# Altium PCB board.PcbDoc (part 2 of 2)
Units mm, origin at the board's own origin, x right, y up, seen from the top; angles counter-clockwise.
Board outline 37.92 x 150 mm, 2 copper layers (Top Layer, Bottom Layer), stack 1.66 mm thick; 126 components, 64 nets, 338 pads, 180 vias.
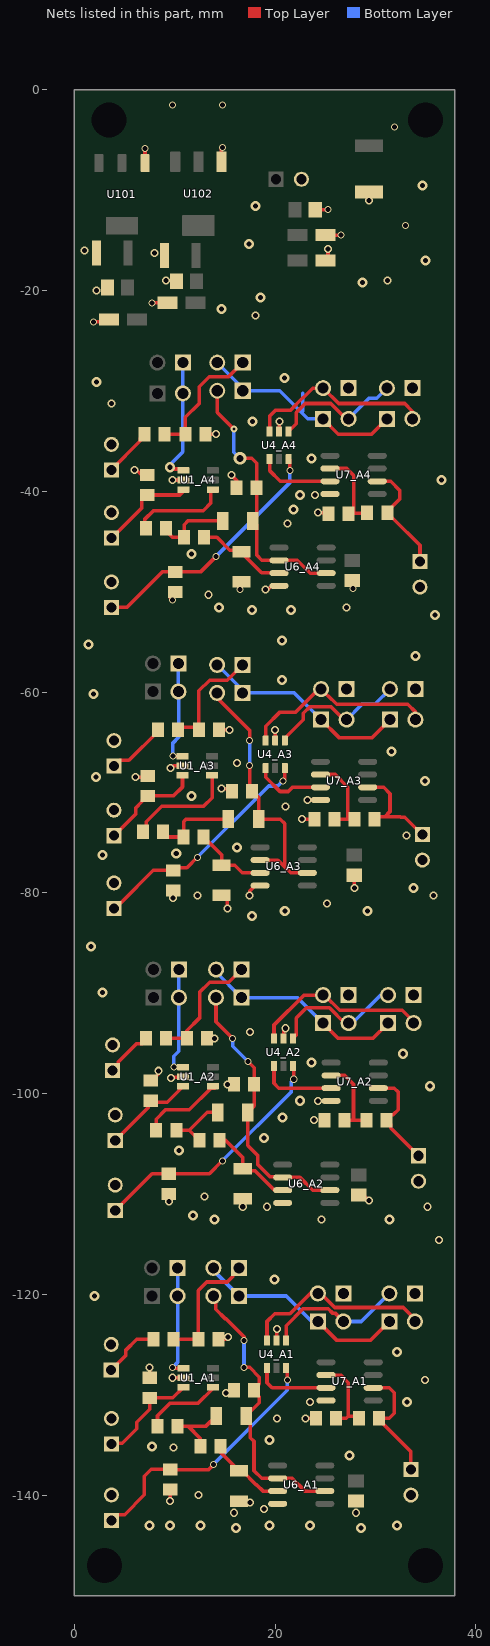
[diagram p2: the nets of this part, all layers, seen from the top]

## Via types
v1: diameter 0.8, hole 0.5, Top Layer to Bottom Layer, 69 vias
v2: diameter 1, hole 0.5, Top Layer to Bottom Layer, 63 vias
v3: diameter 0.7, hole 0.5, Top Layer to Bottom Layer, 30 vias
v4: diameter 1.27, hole 0.711, Top Layer to Bottom Layer, 17 vias
v5: diameter 0.7, hole 0.3, Top Layer to Bottom Layer, 1 vias

## Nets (pads, with @x,y where several pads share a name; then routed paths per layer and width w, separated by ;. In a path a pad name is that pad's centre, name@x,y a point inside that pad or via, vN(x,y) a via of type N, cw(c..) or ccw(c..) an arc to the next point about the centre after c; other vN are vias at no path point) (continued)
GND: C2_A1.1 C2_A2.1 C2_A3.1 C2_A4.1 C3_A1.1 C3_A2.1 C3_A3.1 C3_A4.1 C101.2 C102.2 C103.1 C104.2 C105.2 C106.1 C107.1 C108.1 C109.1 D1.1 J1_A1.1 J1_A2.1 J1_A3.1 J1_A4.1 J8_A1.1 J8_A2.1 J8_A3.1 J8_A4.1 J100.2 J_A1.2 J_A2.2 J_A3.2 J_A4.2 J_B1.2 J_B2.2 J_B3.2 J_B4.2 J_C1.2 J_C2.2 J_C3.2 J_C4.2 J_D1.2 J_D2.2 J_D3.2 J_D4.2 pad.0@3.448,-3 pad.0@35,-3 R1_A1.1 R1_A2.1 R1_A3.1 R1_A4.1 R2_A1.1 R2_A2.1 R2_A3.1 R2_A4.1 R5_A1.1 R5_A2.1 R5_A3.1 R5_A4.1 R8_A1.2 R8_A2.2 R8_A3.2 R8_A4.2 R9_A1.1 R9_A2.1 R9_A3.1 R9_A4.1 U1_A1.2 U1_A2.2 U1_A3.2 U1_A4.2 U4_A1.2 U4_A2.2 U4_A3.2 U4_A4.2 U6_A1.4 U6_A2.4 U6_A3.4 U6_A4.4 U7_A1.4 U7_A2.4 U7_A3.4 U7_A4.4 U101.1 U102.1 | length 47.4
  Top Layer w0.356: v3(1.905,-23.114) 3.194,-23.114 C104.2@3.448,-22.86 ; v1(5.988,-37.846) 6.176,-37.846 6.684,-38.354 R1_A4.1@7.258,-38.354 ; v1(6.115,-68.453) 7.192,-68.453 R1_A3.1@7.319,-68.326 ; U101.1@7.05,-7.289 v3(7.05,-5.842) ; R1_A1.1@7.512,-128.286 v1(7.512,-127.254) ; R1_A2.1@7.62,-98.695 7.745,-98.695 8.322,-98.118 8.322,-97.792 v1(8.407,-97.707) v1@8.492,-97.792 ; v3(7.747,-21.209) C105.2@9.271,-21.209 ; v1(9.544,-140.565) R8_A1.2@9.544,-139.43 ; R8_A4.2@9.544,-50.022 9.544,-50.546 v3(9.798,-50.8) ; v1(9.605,-67.564) 9.859,-67.31 U1_A3.2@10.783,-67.31 ; v1(9.652,-98.425) 9.715,-98.362 10.786,-98.362 U1_A2.2@10.849,-98.298 ; v1(9.798,-128.286) 10.863,-128.286 U1_A1.2@10.879,-128.27 ; v1(9.798,-38.862) U1_A4.2@11.063,-38.862 ; v1(9.859,-80.518) R8_A3.2@9.859,-79.74 ; R9_A4.1@13.068,-34.29 v1(14.116,-34.29) ; R9_A1.1@14.354,-124.46 15.043,-124.46 v1(15.297,-124.206) ; R9_A3.1@14.415,-63.754 v1(15.463,-63.754) ; U102.1@14.659,-7.16 14.659,-5.876 v3(14.772,-5.763) ; C2_A3.1@14.685,-80.24 14.862,-80.24 15.259,-80.637 v1(15.259,-81.534) ; v1(14.685,-69.596) 15.463,-69.596 R2_A3.1@15.717,-69.85 ; v1(15.259,-99.06) R2_A2.1@15.924,-99.06 ; v1(15.64,-38.354) 16.164,-38.878 R2_A4.1@16.164,-39.624 ; v3(16.513,-49.784) 16.513,-49.157 C2_A4.1@16.656,-49.014 ; v1(16.783,-111.252) C2_A2.1@16.783,-110.466 ; v1(17.463,-80.24) 17.463,-79.837 U6_A3.4@18.037,-79.263 ; v1(19.069,-49.784) 19.154,-49.699 19.39,-49.699 19.686,-49.403 U6_A4.4@19.927,-49.403 ; U4_A3.2@20.019,-64.814 v1(20.019,-63.754) ; U4_A1.2@20.151,-124.57 20.151,-123.505 v1(20.212,-123.444) ; U4_A4.2@20.405,-34.036 20.405,-33.081 v1(20.466,-33.02) ; U4_A2.2@20.847,-94.488 20.847,-93.66 v1(21.035,-93.472) ; v1(22.704,-72.644) R5_A3.1@23.909,-72.644 ; v1(23.05,-132.334) R5_A1.1@24.082,-132.334 ; v1(23.212,-70.739) U7_A3.4@24.527,-70.739 ; C103.1@24.006,-11.938 v3(25.292,-11.938) ; v1(24.26,-42.118) 25.208,-42.118 R5_A4.1@25.308,-42.218 ; C101.2@25.038,-14.478 v3(26.562,-14.478) ; C102.2@25.044,-17.018 25.275,-16.787 v1(25.275,-15.875) ; C3_A4.1@27.705,-48.879 27.705,-49.609 v3(27.769,-49.673) ; v1(27.893,-79.502) C3_A3.1@27.893,-78.232 ; C3_A2.1@28.34,-110.093 28.832,-110.093 v1(29.356,-110.617)
  Bottom Layer w0.356: v1(9.652,-98.425) v1@9.737,-98.34
  other v1: 15.91,-141.732 28.067,-141.732 18.923,-141.351 17.515,-140.716 12.354,-139.954 9.893,-135.255 20.212,-132.334 23.495,-130.683 15.132,-129.794 34.944,-128.524 36.325,-114.554 24.638,-112.522 19.201,-111.252 35.179,-111.252 9.417,-110.744 12.973,-110.236 23.876,-102.616 24.276,-100.711 13.989,-94.488 17.526,-93.853 25.165,-81.026 12.258,-80.264 35.767,-80.264 33.077,-74.272 21.035,-71.374 16.209,-67.056 27.131,-51.554 13.354,-50.292 21.228,-43.18 24,-40.354 3.702,-31.242 18.034,-22.479 2.234,-20 9.147,-19 31.182,-19 8,-16.256 1,-16 29.356,-11
  other v2: 16.129,-143.256 28.575,-143.256 7.512,-143.002 9.544,-143.002 12.559,-143.002 19.431,-143.002 23.495,-143.002 32.131,-143.002 27.432,-136.017 7.75,-135.128 19.431,-134.493 33.147,-130.683 32.131,-125.73 2.032,-120.142 19.939,-118.491 13.989,-112.522 31.388,-112.522 11.811,-112.141 10.417,-105.664 18.923,-104.394 20.764,-102.362 22.479,-100.695 35.433,-99.248 23.622,-96.901 32.766,-96.012 2.794,-89.916 1.651,-85.344 17.717,-82.296 20.969,-81.788 29.227,-81.788 33.801,-79.502 2.794,-76.232 10.16,-76.073 16.209,-75.453 11.684,-70.358 34.925,-68.834 2.159,-68.453 31.623,-65.913 1.905,-60.198 20.701,-58.801 33.989,-56.388 1.397,-55.245 20.701,-54.864 35.941,-52.324 17.717,-51.816 21.59,-51.816 14.415,-51.554 11.684,-46.228 21.844,-41.783 22.479,-40.354 36.576,-38.862 23.622,-36.703 17.769,-33.02 2.234,-29.083 20.955,-28.702 14.659,-21.844 18.542,-20.701 28.702,-19.177 35,-17.018 17.399,-15.367 18.034,-11.557 34.671,-9.525
  other v3: 33,-13.51 31.896,-3.683 9.779,-1.524 14.772,-1.524
NetC1_A1_1: C1_A1.1 R3_A1.1 R4_A1.2 | length 6.8
  Top Layer w0.356: R3_A1.1@10.29,-133.096 11.322,-133.096 ; R4_A1.2@12.559,-135.128 12.559,-134.333 11.322,-133.096 ; C1_A1.1@14.14,-132.08 13.124,-133.096 11.322,-133.096
NetC1_A1_2: C1_A1.2 J4_A1.2 R2_A1.2 U6_A1.2 U6_A1.6 | length 28.9
  Top Layer w0.356: J4_A1.2@13.862,-120.142 14.1,-120.38 14.1,-121.461 15.067,-122.428 15.132,-122.428 16.91,-124.206 v3(16.91,-124.57) ; v3(16.91,-127.254) 17.468,-127.254 18.434,-128.22 18.434,-128.903 17.797,-129.54 18.434,-130.177 18.434,-130.786 C1_A1.2@17.14,-132.08 17.537,-132.477 17.537,-134.25 17.907,-134.62 17.907,-137.541 18.669,-138.303 U6_A1.2@20.256,-138.303 21.717,-138.303 22.987,-139.573 U6_A1.6@24.956,-139.573
  Bottom Layer w0.356: v3(16.91,-127.254) v3(16.91,-124.57)
NetC1_A2_1: C1_A2.1 R3_A2.1 R4_A2.2 | length 6.3
  Top Layer w0.356: R3_A2.1@10.163,-103.632 11.465,-103.632 ; R4_A2.2@12.481,-104.648 11.465,-103.632 ; C1_A2.1@14.283,-101.854 13.243,-101.854 11.465,-103.632
NetC1_A2_2: C1_A2.2 J4_A2.2 R2_A2.2 U6_A2.2 U6_A2.6 | length 27.1
  Top Layer w0.356: J4_A2.2@14.132,-90.44 J4_A2.2@14.116,-90.424 14.116,-92.821 v3(15.783,-94.488) ; v3(17.291,-96.774) 17.924,-97.407 R2_A2.2@17.924,-99.06 17.924,-101.213 C1_A2.2@17.283,-101.854 17.283,-105.148 18.298,-106.162 18.298,-107.062 19.519,-108.284 20.717,-108.284 U6_A2.2@20.764,-108.331 22.479,-108.331 23.749,-109.601 U6_A2.6@25.464,-109.601
  Bottom Layer w0.356: v3(15.783,-94.488) 15.783,-95.266 v3(17.291,-96.774)
NetC1_A3_1: C1_A3.1 R3_A3.1 R4_A3.2 | length 8.4
  Top Layer w0.356: R3_A3.1@8.827,-73.914 9.335,-74.422 R4_A3.2@10.891,-74.422 10.891,-72.882 11.129,-72.644 C1_A3.1@15.358,-72.644
NetC1_A3_2: C1_A3.2 J4_A3.2 R2_A3.2 U6_A3.2 U6_A3.6 | length 26.6
  Top Layer w0.356: J4_A3.2@14.238,-60.071 14.476,-60.309 14.476,-60.812 17.479,-63.815 v3(17.479,-64.814) ; v3(17.479,-67.31) 17.479,-69.612 R2_A3.2@17.717,-69.85 18.358,-70.491 C1_A3.2@18.358,-72.644 20.527,-72.644 20.969,-73.086 20.969,-77.404 ; U6_A3.2@18.512,-76.723 20.288,-76.723 20.969,-77.404 ; U6_A3.6@23.212,-77.993 21.558,-77.993 20.969,-77.404
  Bottom Layer w0.356: v3(17.479,-67.31) v3(17.479,-64.814)
NetC1_A4_1: C1_A4.1 R3_A4.1 R4_A4.2 | length 7.5
  Top Layer w0.356: R3_A4.1@9.115,-43.91 9.782,-44.577 R4_A4.2@10.941,-44.577 10.941,-43.307 11.322,-42.926 C1_A4.1@14.869,-42.926
NetC1_A4_2: C1_A4.2 J4_A4.2 R2_A4.2 U6_A4.2 U6_A4.6 | length 26.7
  Top Layer w0.356: J4_A4.2@14.243,-29.972 14.243,-32.131 v5(15.894,-33.782) ; v4(16.513,-36.703) 17.686,-36.703 18.164,-37.181 R2_A4.2@18.164,-39.624 18.164,-42.531 C1_A4.2@17.769,-42.926 18.164,-43.321 18.164,-46.339 18.688,-46.863 U6_A4.2@20.402,-46.863 22.228,-46.863 23.498,-48.133 U6_A4.6@25.102,-48.133
  Bottom Layer w0.356: v5(15.894,-33.782) 15.894,-36.084 v4(16.513,-36.703)
NetC2_A1_2: C2_A1.2 R4_A1.1 U6_A1.3 | length 7.9
  Top Layer w0.356: R4_A1.1@14.559,-135.128 14.559,-135.722 C2_A1.2@16.402,-137.565 16.727,-137.565 18.1,-138.938 18.161,-138.938 18.796,-139.573 U6_A1.3@20.256,-139.573
NetC2_A2_2: C2_A2.2 R4_A2.1 U6_A2.3 | length 9
  Top Layer w0.356: R4_A2.1@14.481,-104.648 15.082,-104.648 16.783,-106.349 C2_A2.2@16.783,-107.466 16.987,-107.67 18.008,-107.67 19.892,-109.554 20.717,-109.554 U6_A2.3@20.764,-109.601
NetC2_A3_2: C2_A3.2 R4_A3.1 U6_A3.3 | length 7.2
  Top Layer w0.356: R4_A3.1@12.891,-74.422 14.685,-76.216 C2_A3.2@14.685,-77.24 15.979,-77.24 16.732,-77.993 U6_A3.3@18.037,-77.993
NetC2_A4_2: C2_A4.2 R4_A4.1 U6_A4.3 | length 9.7
  Top Layer w0.356: R4_A4.1@12.941,-44.577 14.211,-44.577 15.497,-45.863 16.656,-45.863 C2_A4.2@17.291,-46.498 ; C2_A4.2@16.656,-46.114 18.659,-48.117 U6_A4.3@20.402,-48.117
NetJ1_A1_2: J1_A1.2 J7_A1.2 U4_A1.3 | length 19.1
  Top Layer w0.356: U4_A1.3@19.201,-124.57 19.201,-122.682 19.963,-121.92 21.482,-121.92 23.514,-119.888 24.558,-119.888 25.955,-121.285 32.785,-121.285 33.928,-122.428 J7_A1.2@33.928,-122.682
NetJ1_A2_2: J1_A2.2 J7_A2.2 U4_A2.3 | length 17.7
  Top Layer w0.356: U4_A2.3@19.897,-94.488 19.897,-93.152 22.879,-90.17 J1_A2.2@24.784,-90.17 24.911,-90.17 25.622,-90.881 25.65,-90.881 26.449,-91.68 32.672,-91.68 33.801,-92.809 J7_A2.2@33.801,-92.964
NetJ1_A3_2: J1_A3.2 J7_A3.2 U4_A3.3 | length 19.6
  Top Layer w0.356: U4_A3.3@19.069,-64.814 19.069,-63.403 20.496,-61.976 22.051,-61.976 24.337,-59.69 J1_A3.2@24.591,-59.69 25.302,-60.401 25.33,-60.401 26.143,-61.214 33.227,-61.214 33.989,-61.976 J7_A3.2@33.989,-62.738
NetJ1_A4_2: J1_A4.2 J7_A4.2 U4_A4.3 | length 18.6
  Top Layer w0.356: U4_A4.3@19.455,-34.036 19.455,-32.507 20.047,-31.915 21.543,-31.915 22.775,-30.683 22.798,-30.683 23.763,-29.718 J1_A4.2@24.784,-29.718 24.812,-29.718 26.336,-31.242 32.912,-31.242 33.674,-32.004 J7_A4.2@33.674,-32.766
NetJ2_A1_1: J2_A1.1 J4_A1.1 J6_A1.2 J7_A1.1 | length 21.4
  Top Layer w0.356: J2_A1.1@24.276,-122.682 26.164,-124.57 29.5,-124.57 J7_A1.1@31.388,-122.682
  Bottom Layer w0.356: J6_A1.2@13.862,-117.348 13.862,-117.602 J4_A1.1@16.402,-120.142 21.116,-120.142 23.656,-122.682 J2_A1.1@24.276,-122.682
NetJ2_A1_2: J2_A1.2 J8_A1.2 U4_A1.1 | length 14.1
  Top Layer w0.356: U4_A1.1@21.101,-124.57 21.101,-123.091 22.78,-121.412 25.292,-121.412 25.724,-121.844 25.978,-121.844 J2_A1.2@26.816,-122.682
  Bottom Layer w0.356: J2_A1.2@26.816,-122.682 28.594,-122.682 J8_A1.2@31.388,-119.888
NetJ2_A2_1: J2_A2.1 J4_A2.1 J6_A2.2 J7_A2.1 | length 20.8
  Top Layer w0.356: J2_A2.1@24.784,-92.964 26.308,-94.488 29.737,-94.488 J7_A2.1@31.261,-92.964
  Bottom Layer w0.356: J6_A2.2@14.132,-87.63 14.132,-87.9 J4_A2.1@16.656,-90.424 22.244,-90.424 J2_A2.1@24.784,-92.964
NetJ2_A2_2: J2_A2.2 J8_A2.2 U4_A2.1 | length 13.5
  Top Layer w0.356: U4_A2.1@21.797,-94.488 22.117,-94.168 22.117,-92.456 23.133,-91.44 25.419,-91.44 26.943,-92.964 J2_A2.2@27.324,-92.964
  Bottom Layer w0.356: J2_A2.2@27.324,-92.964 27.705,-92.964 30.499,-90.17 J8_A2.2@31.261,-90.17
NetJ2_A3_1: J2_A3.1 J4_A3.1 J6_A3.2 J7_A3.1 | length 21.1
  Top Layer w0.356: J2_A3.1@24.591,-62.738 26.369,-64.516 29.671,-64.516 J7_A3.1@31.449,-62.738
  Bottom Layer w0.356: J6_A3.2@14.238,-57.277 16.778,-59.817 J4_A3.1@16.778,-60.071 21.924,-60.071 J2_A3.1@24.591,-62.738
NetJ2_A3_2: J2_A3.2 J8_A3.2 U4_A3.1 | length 14.2
  Top Layer w0.356: U4_A3.1@20.969,-64.814 20.969,-64.582 22.813,-62.738 22.813,-62.103 23.448,-61.468 25.607,-61.468 26.877,-62.738 J2_A3.2@27.131,-62.738
  Bottom Layer w0.356: J2_A3.2@27.131,-62.738 28.655,-61.214 29.925,-61.214 J8_A3.2@31.449,-59.69
NetJ2_A4_1: J2_A4.1 J4_A4.1 J6_A4.2 J7_A4.1 | length 22.4
  Top Layer w0.356: J2_A4.1@24.784,-32.766 26.308,-34.29 29.61,-34.29 J7_A4.1@31.134,-32.766
  Bottom Layer w0.356: J6_A4.2@14.243,-27.178 16.783,-29.718 J4_A4.1@16.783,-29.972 20.466,-29.972 23.26,-32.766 J2_A4.1@24.784,-32.766 ; 22.752,-32.004 22.752,-30.226
NetJ2_A4_2: J2_A4.2 J8_A4.2 U4_A4.1 | length 13.5
  Top Layer w0.356: U4_A4.1@21.355,-34.036 21.355,-34.021 22.102,-33.274 22.102,-32.146 23.006,-31.242 25.546,-31.242 27.07,-32.766 J2_A4.2@27.324,-32.766
  Bottom Layer w0.356: J2_A4.2@27.324,-32.766 29.356,-30.734 30.118,-30.734 J8_A4.2@31.134,-29.718
NetJ3_A1_2: J3_A1.2 J5_A1.1 U1_A1.1 | length 11.2
  Top Layer w0.356: v3(9.798,-127.254) 9.864,-127.32 U1_A1.1@10.879,-127.32
  Bottom Layer w0.356: v3(9.798,-127.254) 10.29,-126.762 J3_A1.2@10.29,-120.142 J5_A1.1@10.29,-117.348
NetJ3_A2_2: J3_A2.2 J5_A2.1 U1_A2.1 | length 10.8
  Top Layer w0.356: v3(9.925,-97.348) U1_A2.1@10.849,-97.348
  Bottom Layer w0.356: v3(9.925,-97.348) 9.925,-96.266 10.417,-95.774 J3_A2.2@10.417,-90.424 J5_A2.1@10.417,-87.63
NetJ3_A3_2: J3_A3.2 J5_A3.1 U1_A3.1 | length 10.4
  Top Layer w0.356: v3(9.831,-66.36) U1_A3.1@10.783,-66.36
  Bottom Layer w0.356: v3(9.831,-66.36) 9.831,-65.052 10.418,-64.465 10.418,-59.995 J3_A3.2@10.367,-59.944 J5_A3.1@10.367,-57.15
NetJ3_A4_2: J3_A4.2 J5_A4.1 U1_A4.1 | length 12.1
  Top Layer w0.356: v2(9.544,-37.592) 9.718,-37.592 9.891,-37.765 10.716,-37.765 U1_A4.1@10.863,-37.912
  Bottom Layer w0.356: v2@9.544,-37.338 10.814,-36.068 J3_A4.2@10.814,-30.226 J5_A4.1@10.814,-27.178
NetJ6_A1_1: J6_A1.1 R7_A1.1 R9_A1.2 | length 12.4
  Top Layer w0.356: R7_A1.1@9.893,-124.46 R9_A1.2@12.354,-124.46 12.354,-119.599 13.208,-118.745 15.24,-118.745 15.78,-118.205 15.78,-117.97 J6_A1.1@16.402,-117.348
NetJ6_A2_1: J6_A2.1 R7_A2.1 R9_A2.2 | length 12.3
  Top Layer w0.356: R7_A2.1@9.147,-94.488 R9_A2.2@11.211,-94.488 11.211,-93.726 12.481,-92.456 12.481,-89.9 13.481,-88.9 15.402,-88.9 J6_A2.1@16.672,-87.63
NetJ6_A3_1: J6_A3.1 R7_A3.1 R9_A3.2 | length 11.4
  Top Layer w0.356: R7_A3.1@10.351,-63.5 R9_A3.2@12.415,-63.5 ; R9_A3.2@12.415,-63.754 R9_A3.2@12.415,-63.5 ; J6_A3.1@16.778,-57.277 15.254,-58.801 13.481,-58.801 12.415,-59.867 R9_A3.2@12.415,-63.5
NetJ6_A4_1: J6_A4.1 R7_A4.1 R9_A4.2 | length 12.7
  Top Layer w0.356: R7_A4.1@9.004,-34.29 R9_A4.2@11.068,-34.29 11.068,-32.625 12.451,-31.242 12.451,-29.573 13.434,-28.59 15.371,-28.59 J6_A4.1@16.783,-27.178
NetJ_A1_1: J_A1.1 R1_A4.2 U1_A4.3 | length 10
  Top Layer w0.356: J_A1.1@3.702,-44.658 6.711,-41.649 6.711,-40.647 7.004,-40.354 R1_A4.2@7.258,-40.354 10.521,-40.354 U1_A4.3@11.063,-39.812
NetJ_A2_1: J_A2.1 R1_A3.2 U1_A3.3 | length 10.4
  Top Layer w0.356: J_A2.1@3.956,-74.295 6.115,-72.136 6.115,-71.53 6.772,-70.873 6.772,-70.748 7.194,-70.326 R1_A3.2@7.319,-70.326 9.891,-70.326 10.783,-69.434 U1_A3.3@10.783,-68.26
NetJ_A3_1: J_A3.1 R1_A2.2 U1_A2.3 | length 9.4
  Top Layer w0.356: J_A3.1@4.083,-104.648 7.346,-101.385 7.346,-100.99 R1_A2.2@7.631,-100.706 ; R1_A2.2@7.62,-100.695 7.763,-100.838 9.259,-100.838 U1_A2.3@10.849,-99.248
NetJ_A4_1: J_A4.1 R1_A1.2 U1_A1.3 | length 10.6
  Top Layer w0.356: J_A4.1@3.702,-134.874 3.78,-134.796 4.777,-134.796 6.223,-133.35 6.223,-132.708 7.512,-131.419 R1_A1.2@7.512,-130.286 9.813,-130.286 U1_A1.3@10.879,-129.22
NetJ_B1_1: J_B1.1 R6_A4.2 U7_A4.6 | length 11.6
  Top Layer w0.356: U7_A4.6@30.182,-38.989 31.515,-38.989 32.404,-39.878 32.404,-40.771 31.182,-41.993 31.182,-42.243 31.604,-42.665 31.729,-42.665 34.436,-45.372 J_B1.1@34.436,-46.99
NetJ_B2_1: J_B2.1 R6_A3.2 U7_A3.6 | length 10.6
  Top Layer w0.356: U7_A3.6@29.227,-69.469 30.814,-69.469 31.449,-70.104 31.449,-71.882 30.941,-72.39 ; R6_A3.2@29.909,-72.644 30.163,-72.39 30.941,-72.39 ; J_B2.1@34.67,-74.183 32.928,-72.441 32.531,-72.441 32.48,-72.39 30.941,-72.39
NetJ_B3_1: J_B3.1 R6_A2.2 U7_A2.6 | length 10.4
  Top Layer w0.356: U7_A2.6@30.29,-99.441 31.877,-99.441 32.258,-99.822 32.258,-101.6 31.789,-102.069 31.521,-102.069 31.099,-102.491 R6_A2.2@31.099,-102.616 31.521,-103.038 31.521,-103.403 J_B3.1@34.29,-106.172
NetJ_B4_1: J_B4.1 R6_A1.2 U7_A1.6 | length 12.5
  Top Layer w0.356: U7_A1.6@29.782,-129.286 31.369,-129.286 31.877,-129.794 31.877,-131.826 31.369,-132.334 R6_A1.2@30.356,-132.334 30.356,-132.459 33.528,-135.631 J_B4.1@33.528,-137.43
NetJ_C1_1: J_C1.1 R8_A4.1 U4_A4.6 | length 25.3
  Top Layer w0.356: J_C1.1@3.702,-51.554 5.234,-51.554 8.766,-48.022 R8_A4.1@10.052,-48.022 12.576,-48.022 v3(14.116,-46.482) ; U4_A4.6@21.355,-36.786 21.482,-36.913 v3(21.482,-37.912)
  Bottom Layer w0.356: v3(14.116,-46.482) 21.482,-39.116 v3(21.482,-37.912)
NetJ_C2_1: J_C2.1 R8_A3.1 U4_A3.6 | length 23.3
  Top Layer w0.356: J_C2.1@3.956,-81.534 4.528,-80.962 4.655,-80.962 7.877,-77.74 R8_A3.1@9.859,-77.74 ; R8_A3.1@9.859,-77.486 11.226,-77.486 v3(12.258,-76.454) ; v3(20.781,-68.834) 20.969,-68.646 U4_A3.6@20.969,-67.564
  Bottom Layer w0.356: v3(12.258,-76.454) 19.37,-69.342 20.273,-69.342 v3(20.781,-68.834)
NetJ_C3_1: J_C3.1 R8_A2.1 U4_A2.6 | length 25.1
  Top Layer w0.356: J_C3.1@4.083,-111.633 7.75,-107.966 R8_A2.1@9.417,-107.966 13.465,-107.966 v3(14.751,-106.68) ; U4_A2.6@21.797,-97.238 21.863,-97.304 v3(21.863,-98.552)
  Bottom Layer w0.356: v3(14.751,-106.68) 21.609,-99.822 21.609,-98.806 v3(21.863,-98.552)
NetJ_C4_1: J_C4.1 R8_A1.1 U4_A1.6 | length 26.3
  Top Layer w0.356: J_C4.1@3.702,-142.494 4.274,-141.922 5.017,-141.922 6.985,-139.954 6.985,-138.092 7.663,-137.414 9.528,-137.414 R8_A1.1@9.544,-137.43 13.402,-137.43 13.862,-136.97 v3(13.862,-136.906) ; U4_A1.6@21.101,-127.32 21.228,-127.447 v3(21.228,-128.524)
  Bottom Layer w0.356: v3(13.862,-136.906) 21.228,-129.54 v3(21.228,-128.524)
NetJ_D1_1: J_D1.1 R7_A4.2 | length 4.9
  Top Layer w0.356: J_D1.1@3.702,-37.846 6.582,-34.966 6.582,-34.712 R7_A4.2@7.004,-34.29
NetJ_D2_1: J_D2.1 R7_A3.2 | length 6
  Top Layer w0.356: J_D2.1@3.956,-67.354 4.528,-66.782 5.448,-66.782 8.351,-63.879 R7_A3.2@8.351,-63.754
NetJ_D3_1: J_D3.1 R7_A2.2 | length 4.9
  Top Layer w0.356: J_D3.1@3.829,-97.663 4.401,-97.091 4.401,-96.818 6.184,-95.035 6.725,-95.035 7.147,-94.613 R7_A2.2@7.147,-94.488
NetJ_D4_1: J_D4.1 R7_A1.2 | length 5.8
  Top Layer w0.356: J_D4.1@3.683,-127.508 5.112,-126.079 5.112,-125.571 6.223,-124.46 R7_A1.2@7.893,-124.46
NetR3_A1_2: R3_A1.2 U1_A1.4 | length 7.8
  Top Layer w0.356: R3_A1.2@8.29,-133.096 8.29,-132.064 9.509,-130.845 12.303,-130.845 13.829,-129.319 U1_A1.4@13.829,-129.22
NetR3_A2_2: R3_A2.2 U1_A2.4 | length 8.5
  Top Layer w0.356: R3_A2.2@8.163,-103.632 8.163,-102.523 9.086,-101.6 11.465,-101.6 13.627,-99.438 13.989,-99.438 U1_A2.4@13.799,-99.248
NetR3_A3_2: R3_A3.2 U1_A3.4 | length 11
  Top Layer w0.356: R3_A3.2@6.827,-73.914 7.18,-73.561 7.18,-72.899 8.705,-71.374 12.875,-71.374 13.733,-70.516 U1_A3.4@13.733,-68.26
NetR3_A4_2: R3_A4.2 U1_A4.4 | length 9.7
  Top Layer w0.356: R3_A4.2@7.004,-43.688 7.004,-42.799 7.893,-41.91 12.846,-41.91 13.613,-41.143 13.613,-39.812 U1_A4.4@13.796,-39.812
NetR5_A1_2: R5_A1.2 R6_A1.1 U7_A1.2 | length 8.3
  Top Layer w0.356: U7_A1.2@25.082,-128.016 26.543,-128.016 27.305,-128.778 27.305,-132.126 ; R5_A1.2@26.082,-132.334 27.097,-132.334 27.305,-132.126 ; R6_A1.1@28.356,-132.334 28.148,-132.126 27.305,-132.126
NetR5_A2_2: R5_A2.2 R6_A2.1 U7_A2.2 | length 8.4
  Top Layer w0.356: U7_A2.2@25.59,-98.171 26.943,-98.171 27.813,-99.041 27.813,-102.536 27.733,-102.616 ; R5_A2.2@26.908,-102.616 27.733,-102.616 ; R6_A2.1@29.099,-102.616 27.733,-102.616
NetR5_A3_2: R5_A3.2 R6_A3.1 U7_A3.2 | length 8.9
  Top Layer w0.356: U7_A3.2@24.527,-68.199 25.988,-68.199 27.258,-69.469 27.258,-72.39 27.655,-72.39 R6_A3.1@27.909,-72.644 R5_A3.2@25.909,-72.644
NetR5_A4_2: R5_A4.2 R6_A4.1 U7_A4.2 | length 8.5
  Top Layer w0.356: U7_A4.2@25.482,-37.719 27.131,-37.719 27.832,-38.42 R5_A4.2@27.832,-42.164 ; R5_A4.2@27.308,-42.218 27.362,-42.164 R5_A4.2@27.832,-42.164 ; R6_A4.1@29.372,-42.164 R5_A4.2@27.832,-42.164
NetU4_A1_4: U4_A1.4 U7_A1.3 | length 7.6
  Top Layer w0.356: U4_A1.4@19.201,-127.32 19.201,-128.783 19.704,-129.286 U7_A1.3@25.082,-129.286
NetU4_A2_4: U4_A2.4 U7_A2.3 | length 7.6
  Top Layer w0.356: U4_A2.4@19.897,-97.238 19.897,-98.955 20.383,-99.441 U7_A2.3@25.59,-99.441
NetU4_A3_4: U4_A3.4 U7_A3.3 | length 7.5
  Top Layer w0.356: U4_A3.4@19.069,-67.564 19.069,-68.456 20.502,-69.889 21.311,-69.889 21.731,-69.469 U7_A3.3@24.908,-69.469
NetU4_A4_4: U4_A4.4 U7_A4.3 | length 7.6
  Top Layer w0.356: U4_A4.4@19.455,-36.786 19.455,-37.912 20.532,-38.989 U7_A4.3@25.482,-38.989
pads on no net: U6_A1.1 U6_A1.5 U6_A1.8 U6_A2.1 U6_A2.5 U6_A2.8 U6_A3.1 U6_A3.5 U6_A3.8 U6_A4.1 U6_A4.5 U6_A4.8 U7_A1.1 U7_A1.5 U7_A1.8 U7_A2.1 U7_A2.5 U7_A2.8 U7_A3.1 U7_A3.5 U7_A3.8 U7_A4.1 U7_A4.5 U7_A4.8

## Polygon pours and split planes (outlines as drawn)
GND on Bottom Layer "bot" (solid, remove dead copper, pour order 2): 0,-150 0,0 37.924,0 37.924,-150
GND on Top Layer "top" (solid, remove dead copper, pour order 3): 0,-150 0,0 37.924,0 37.924,-150

## Silkscreen, mask and mechanical layers (free items; w line width, h text height)
Top Overlay:
  lines w0.2: 3.194,-115.57 35.452,-115.57 ; 3.509,-55.626 35.767,-55.626 ; 3.575,-85.852 35.833,-85.852 ; 3.702,-25.654 35.96,-25.654 ; 28.611,-124.46 28.611,-115.57 ; 28.926,-64.516 28.926,-55.626 ; 28.992,-94.742 28.992,-85.852 ; 29.119,-34.544 29.119,-25.654
  lines w0.5: 0.508,-61.976 22.576,-61.976 ; 0.635,-121.92 22.261,-121.92 ; 0.908,-92.202 22.642,-92.202 ; 0.908,-32.004 22.769,-32.004 ; 12.101,-121.92 12.101,-114.046 ; 12.416,-61.976 12.416,-54.102 ; 12.482,-92.202 12.482,-84.328 ; 12.609,-32.004 12.609,-24.13 ; 22.481,-124.46 22.481,-114.046 ; 22.498,-124.443 36.993,-124.443 ; 22.796,-54.102 23.006,-54.312 23.006,-64.499 37.308,-64.499 ; 22.862,-94.742 22.862,-84.328 ; 22.879,-94.725 37.374,-94.725 ; 22.989,-34.544 22.989,-24.13 ; 23.006,-34.527 37.501,-34.527 ; 0.508,-144.399 36.993,-144.399 36.993,-117.111 33.928,-114.046 4.591,-114.046 0.508,-118.129 0.508,-144.399 ; 0.508,-113.411 0.508,-88.792 4.972,-84.328 34.309,-84.328 37.374,-87.393 37.374,-113.411 0.508,-113.411 ; 0.508,-83.439 37.308,-83.439 37.308,-57.167 34.243,-54.102 4.906,-54.102 0.508,-58.5 0.508,-83.439 ; 0.508,-53.34 0.508,-28.721 5.099,-24.13 34.436,-24.13 37.501,-27.195 37.501,-53.34 0.508,-53.34
  text "Power IN" at 25.038,-1.524 h0.8
  text "+" at 16,-3 h3
  text "12V" at 25.044,-3 h0.8
  text "min 7V" at 24.933,-4.218 h0.8
  text "PWM input" at 5.226,-25.4 h0.8
  text "IN ?" at 16.005,-25.4 h0.8
  text "enable Signal?" at 23.768,-25.4 h0.8
  text "high" at 23.768,-26.924 h0.8
  text "low" at 30.88,-26.924 h0.8
  text "analog" at 18.307,-27.432 h0.8
  text "3.3V" at 3.448,-28.194 h0.8
  text "active" at 23.768,-28.194 h0.8
  text "active" at 30.88,-28.194 h0.8
  text "PWM" at 18.688,-30.226 h0.8
  text "5V" at 4.21,-30.48 h0.8
  text "analog in" at 1.127,-33.423 h0.8
  text "PWM in" at 1.416,-40.386 h0.8
  text "out" at 34.944,-44.958 h0.8
  text "enable in" at 1.416,-47.244 h0.8
  text "PWM input" at 5.033,-55.372 h0.8
  text "IN ?" at 15.812,-55.372 h0.8
  text "enable Signal?" at 23.575,-55.372 h0.8
  text "high" at 23.575,-56.896 h0.8
  text "low" at 30.687,-56.896 h0.8
  text "analog" at 18.164,-57.658 h0.8
  text "3.3V" at 2.747,-58.166 h0.8
  text "active" at 23.575,-58.166 h0.8
  text "active" at 30.687,-58.166 h0.8
  text "5V" at 3.509,-60.452 h0.8
  text "PWM" at 19.988,-60.452 h0.8
  text "analog in" at 1.289,-63.119 h0.8
  text "PWM in" at 1.543,-70.104 h0.8
  text "out" at 35.005,-72.39 h0.8
  text "enable in" at 1.416,-77.216 h0.8
  text "PWM input" at 5.099,-85.598 h0.8
  text "IN ?" at 15.878,-85.598 h0.8
  text "enable Signal?" at 23.641,-85.598 h0.8
  text "high" at 23.641,-87.122 h0.8
  text "low" at 30.753,-87.122 h0.8
  text "analog" at 18.074,-87.719 h0.8
  text "3.3V" at 3.321,-88.392 h0.8
  text "active" at 23.641,-88.392 h0.8
  text "active" at 30.753,-88.392 h0.8
  text "5V" at 4.083,-90.678 h0.8
  text "PWM" at 19.196,-90.678 h0.8
  text "analog in" at 0.889,-93.345 h0.8
  text "PWM in" at 1.143,-100.33 h0.8
  text "out" at 34.544,-104.267 h0.8
  text "enable in" at 1.016,-107.315 h0.8
  text "PWM input" at 4.718,-115.316 h0.8
  text "IN ?" at 15.497,-115.316 h0.8
  text "enable Signal?" at 23.26,-115.316 h0.8
  text "high" at 23.26,-116.84 h0.8
  text "low" at 30.372,-116.84 h0.8
  text "analog" at 17.769,-117.6 h0.8
  text "3.3V" at 2.94,-118.11 h0.8
  text "active" at 23.26,-118.11 h0.8
  text "active" at 30.372,-118.11 h0.8
  text "5V" at 3.702,-120.396 h0.8
  text "PWM" at 18.923,-120.904 h0.8
  text "analog in" at 0.762,-123.19 h0.8
  text "PWM in" at 1.143,-130.683 h0.8
  text "out" at 34.036,-135.509 h0.8
  text "enable in" at 1.016,-138.049 h0.8
  text "AOTF board V2" at 18.669,-146.177 h0.8
  text "ew / ck / 2022_10" at 18.822,-147.58 h0.8
  text "Ries group" at 18.767,-148.965 h0.8
M1_BoardOutline:
  the board outline again, w0.254
M12_titleBlock:
  lines w0.127: -67.95,-186.677 -67.95,6.363 ; -67.95,-138.417 -62.87,-138.417 ; -67.95,-90.157 -62.87,-90.157 ; -67.95,-41.897 -62.87,-41.897 ; -62.87,-181.597 -62.87,1.283 ; 78.1,-186.677 78.1,-181.597 ; 104.77,-181.597 69.21,-181.597 69.21,-151.117 104.77,-151.117 ; 105.507,-173.977 219.07,-173.977 ; 105.507,-166.357 219.07,-166.357 ; 105.507,-158.737 142.87,-158.737 ; 142.87,-181.597 142.87,-166.357 142.87,-151.117 ; 151.125,-186.677 151.125,-181.597 ; 151.125,1.283 151.125,6.363 ; 196.21,-181.597 196.21,-166.357 ; 219.07,-138.417 224.15,-138.417 ; 219.07,-90.157 224.15,-90.157 ; 219.07,-41.897 224.15,-41.897 ; 219.07,1.283 219.07,-181.597 ; 224.15,-186.677 224.15,6.363 ; 142.87,-151.117 219.07,-151.117 219.07,-181.597 ; 142.87,-151.117 105.507,-151.117 105.507,-181.597 219.07,-181.597
  lines w0.254: 171.864,-150.495 171.864,-0.635 ; 171.864,-60.273 217.584,-60.273 217.584,-57.733 217.584,-38.735 ; 171.864,-38.735 217.584,-38.735 ; 171.864,-33.655 217.584,-33.655 217.584,-38.735
  text "1" at -31.704,2.934 h0.8
  text "3" at 114.092,2.934 h0.8
  text "4" at 186.99,2.934 h0.8
  text "A" at -66.045,-20.079 h0.8
  text "A" at 220.975,-20.079 h0.8
  text "Abstand von Frontpanelkante" at 174.404,-26.035 h0.8
  text "links unten zum Nullpunkt:" at 174.404,-28.575 h0.8
  text "13,9mm" at 174.404,-31.115 h0.8
  text "Mechanical Layer Definitionen:" at 174.404,-37.413 h0.8
  text "M1_boardOutline" at 174.404,-41.275 h0.8
  text "M11_text_topL" at 174.404,-45.033 h0.8
  text "M12_titleBlock" at 174.404,-47.573 h0.8
  text "M13_3D_topL" at 174.404,-50.113 h0.8
  text "M14_3D_botL" at 174.404,-52.653 h0.8
  text "M15_courtyard_topL" at 174.404,-54.909 h0.8
  text "M16_courtyard_botL" at 174.404,-57.449 h0.8
  text "B" at -66.045,-68.136 h0.8
  text "B" at 220.975,-68.136 h0.8
  text "C" at -66.045,-116.65 h0.8
  text "C" at 220.975,-116.65 h0.8
  text "ENGINEER:" at 106.04,-153.657 h0.8
  text "TITLE:" at 144.14,-153.657 h0.8
  text "PCB DESIGNER:" at 106.04,-161.15 h0.8
  text "D" at -66.045,-164.656 h0.8
  text "D" at 220.975,-164.656 h0.8
  text "EMBL - European" at 64.232,-167.323 h0.8
  text "DATE:" at 106.04,-168.897 h0.8
  text "PART NO.:" at 144.14,-168.897 h0.8
  text "REV:" at 197.48,-168.897 h0.8
  text "Molecular Biology Laboratory" at 70.582,-169.863 h0.8
  text "Meyerhofstrasse 1" at 70.582,-171.768 h0.8
  text ".Print_Date" at 107.31,-171.945 h0.8
  text "69117 Heidelberg" at 70.582,-174.943 h0.8
  text "FILE NAME:" at 106.04,-176.517 h0.8
  text "DWG NO:" at 144.14,-176.517 h0.8
  text "SCALE:" at 197.48,-176.517 h0.8
  text "Germany" at 70.582,-177.8 h0.8
  text ".PCB_FILE_NAME_NO_PATH" at 107.31,-179.565 h0.8
  text "1" at -31.704,-185.026 h0.8
  text "3" at 114.092,-185.026 h0.8
  text "4" at 186.99,-185.026 h0.8